# Altium PCB TX_LPF_Add_on.PcbDoc (part 1 of 2)
Units mm, origin at the board's own origin, x right, y up, seen from the top; angles counter-clockwise.
Board outline 187.14 x 77.23 mm, 2 copper layers (Top Layer, Top, Bottom Layer, Bottom); 102 components, 53 nets, 283 pads, 1391 vias.
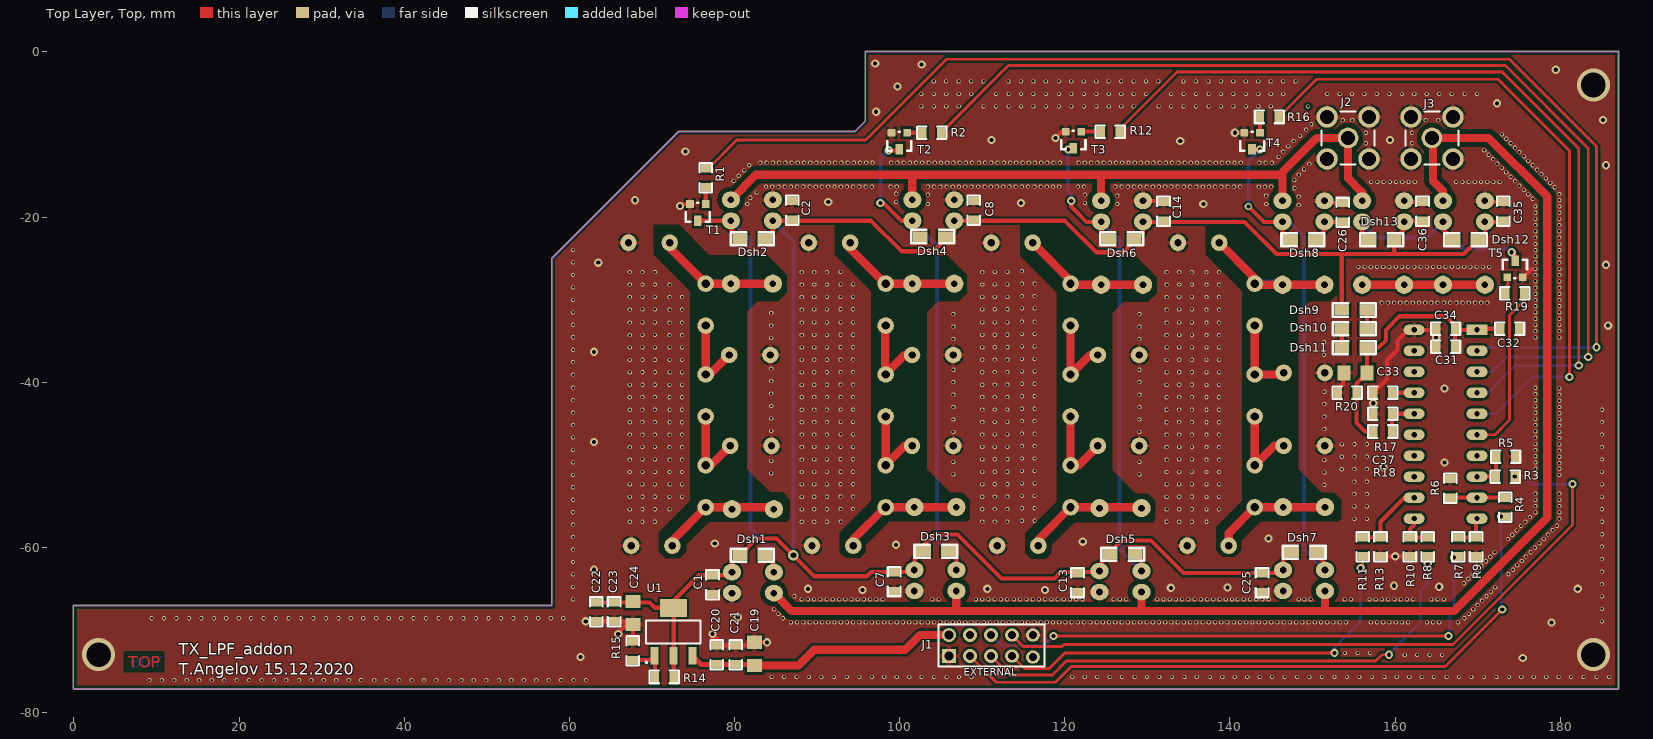
[diagram p0: Top Layer, Top view]
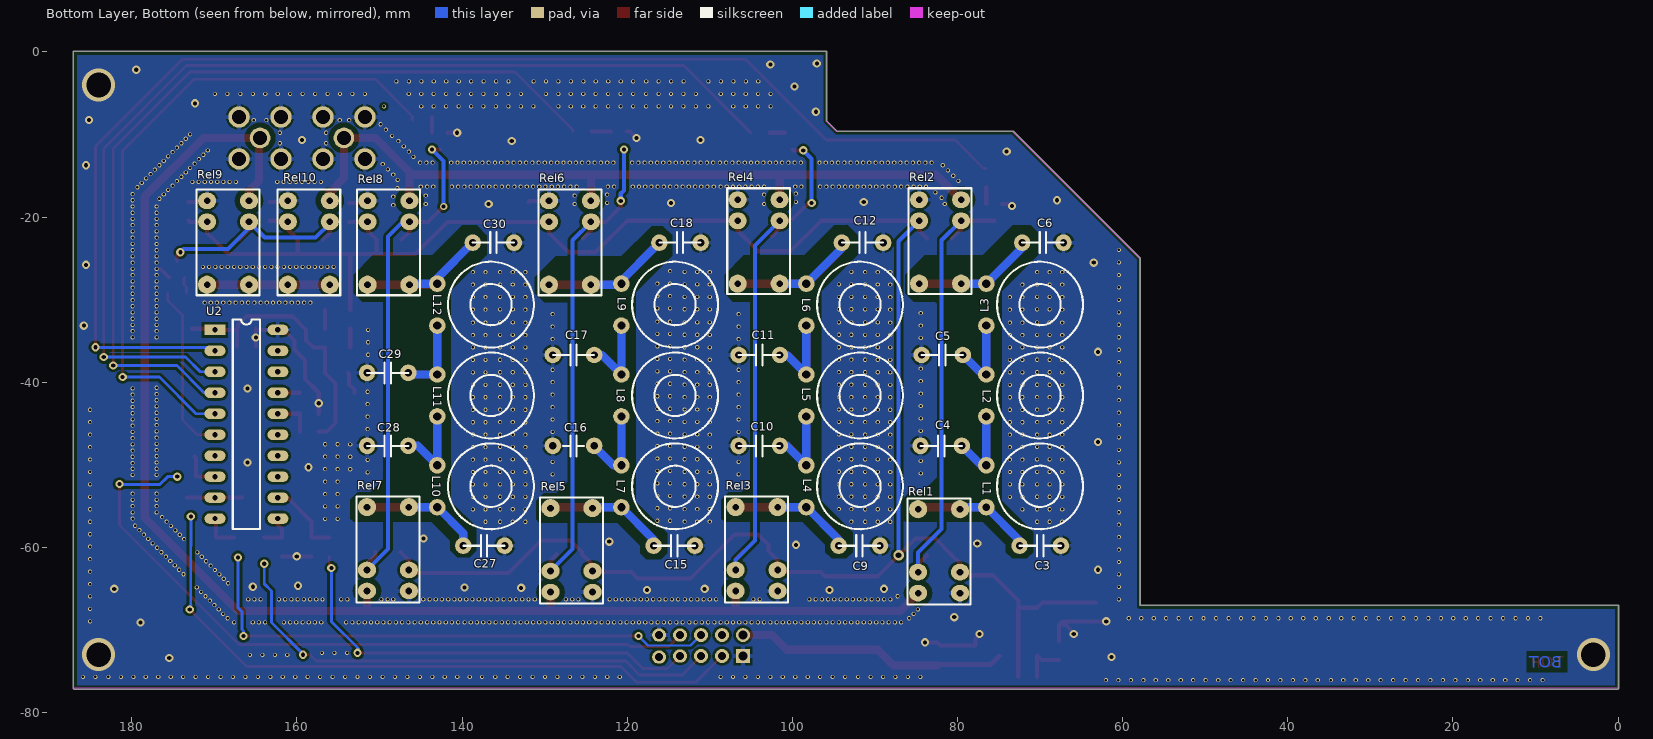
[diagram p1: Bottom Layer, Bottom view, seen from below]

## Layer stack, top to bottom
Top Solder, Top Mask: solder mask 0.0102, Solder Resist, Dk 3.5
Top Layer, Top: signal copper 0.0356
Dielectric 1: dielectric 0.32, FR-4, Dk 4.8
Bottom Layer, Bottom: signal copper 0.0356
Bottom Solder, Bot Mask: solder mask 0.0102, Solder Resist, Dk 3.5

## Board outline
-0.07,-77 ccw(c0,-77) -0.055,-77.044 ccw(c0,-77.088) 0,-77.159 186.999,-77.158 ccw(c186.999,-77.088) 187.069,-77.088 ccw(c186.999,-77.088) 187.054,-77.045 ccw(c187,-77) 187.07,-77 187.07,0 ccw(c187,0) 186.97,0.064 95.906,0.064 ccw(c95.876,0) 95.806,0 95.806,-8.362 94.586,-9.582 73.279,-9.582 ccw(c73.279,-9.652) 73.229,-9.602 cw(c73.279,-9.652) 73.229,-9.602 57.862,-24.969 cw(c57.912,-25.019) 57.862,-24.969 ccw(c57.912,-25.019) 57.842,-25.019 57.842,-67.018 0,-67.018 ccw(c0,-67.088) -0.07,-67.088

## Design rules (kind name [scope] priority, off if disabled: settings)
BoardOutlineClearance [All] p1: gap=0.2 ignorepadtopadclearanceinfootprint=FALSE except(0.4: Arc-SplitBarrior Arc-SplitContinuation Track-SplitBarrior Track-SplitContinuation SMDPad-SplitBarrior SMDPad-SplitContinuation THPad-SplitBarrior THPad-SplitContinuation Via-SplitBarrior Via-SplitContinuation Fill-SplitBarrior Fill-SplitContinuation Poly-SplitBarrior Poly-SplitContinuation Region-SplitBarrior Region-SplitContinuation Text-SplitBarrior Text-SplitContinuation)
Clearance Clearance_3 [InNet('NetJ3_5') vs InNet('GND')] p1: gap=0.6 ignorepadtopadclearanceinfootprint=FALSE
Clearance Clearance_NetJ2_5 [InNet('NetJ2_5') vs InNet('GND')] p2: gap=0.6 ignorepadtopadclearanceinfootprint=FALSE
Clearance [All] p3: gap=0.3 ignorepadtopadclearanceinfootprint=FALSE
HoleSize [All] p1: absolutevalues=TRUE maxlimit=6.3 minlimit=0.2 maxpercent=80.000 minpercent=20.000
MinimumAnnularRing [All] p1: minimumring=0.076
MinimumSolderMaskSliver [All] p1: minsoldermaskwidth=0.01
PolygonConnect PolygonConnect_1 [All] p1: thpad.connectstyle=Relief thpad.reliefconductorwidth=0.508 thpad.reliefentries=4 thpad.polygonreliefangle="90 Angle" thpad.airgapwidth=0.254 smdpad.connectstyle=Relief smdpad.reliefconductorwidth=0.508 smdpad.reliefentries=4 smdpad.polygonreliefangle="90 Angle" smdpad.airgapwidth=0.254 via.connectstyle=Direct via.reliefconductorwidth=0.508 via.reliefentries=4 via.polygonreliefangle="90 Angle" via.airgapwidth=0.254
RoutingCorners [All] p1: cornerstyle=Round minsetback=2.54 maxsetback=2.54
RoutingVias [All] p1: holewidth=0.5 width=1 viastyle="Through Hole" minholewidth=0.2 minwidth=0.45 maxholewidth=1 maxwidth=2
SilkToSilkClearance [All] p1 off: silktosilkclearance=0.01
SilkToSolderMaskClearance [IsPad] p1 off: minsilkscreentomaskgap=0.01 clearancetoexposedcopper=TRUE
SolderMaskExpansion [All] p1: expansion=0.102
Width [All] p1: maxlimit=2.54 minlimit=0.089 preferedwidth=0.381
25 further rules are at their usual default settings.

## Components (designator, comment, footprint, x,y, rotation, side; value= is the part's Value field where it differs from the comment)
C1 "" 0805S 77.343,-63.373 r270 top value=1u
C2 "" 0805S 86.995,-18.034 r270 top value=1u
C3 "CAP_5mm" CAP_5mm 69.977,-59.8 r0 bottom value=470p
C4 "CAP_5mm" CAP_5mm 81.975,-47.7 r180 bottom value=1.2n
C5 "CAP_5mm" CAP_5mm 81.848,-36.7 r180 bottom value=1.2n
C6 "CAP_5mm" CAP_5mm 69.656,-23.1 r0 bottom value=470p
C7 "" 0805S 99.314,-62.992 r270 top value=1u
C8 "" 0805S 108.966,-18.034 r270 top value=1u
C9 "CAP_5mm" CAP_5mm 91.881,-59.8 r0 bottom value=270p
C10 "CAP_5mm" CAP_5mm 104,-47.7 r180 bottom value=680n
C11 "CAP_5mm" CAP_5mm 104,-36.7 r180 bottom value=680n
C12 "CAP_5mm" CAP_5mm 91.5,-23.1 r0 bottom value=270p
C13 "" 0805S 121.539,-63.119 r270 top value=1u
C14 "" 0805S 131.953,-18.161 r270 top value=1u
C15 "CAP_5mm" CAP_5mm 114.3,-59.8 r0 bottom value=180p
C16 "CAP_5mm" CAP_5mm 126.5,-47.7 r180 bottom value=390p
C17 "CAP_5mm" CAP_5mm 126.5,-36.7 r180 bottom value=390p
C18 "CAP_5mm" CAP_5mm 113.598,-23.1 r0 bottom value=180p
C19 "C0805" CAP_1206 82.423,-72.901 r270 top value=10u
C20 "C0805" 0805S 77.851,-71.882 r270 top value=100n
C21 "C0805" 0805S 80.137,-71.882 r270 top value=1u
C22 "C0805" 0805S 63.246,-68.961 r90 top value=100n
C23 "C0805" 0805S 65.405,-68.961 r90 top value=1u
C24 "C0805" CAP_1206 67.691,-67.945 r90 top value=10u
C25 "" 0805S 143.891,-63.119 r270 top value=1u
C26 "" 0805S 153.67,-18.288 r270 top value=1u
C27 "CAP_5mm" CAP_5mm 137.347,-59.8 r0 bottom value=100p
C28 "CAP_5mm" CAP_5mm 149,-47.7 r180 bottom value=220p
C29 "CAP_5mm" CAP_5mm 149,-38.862 r180 bottom value=220p
C30 "CAP_5mm" CAP_5mm 136.204,-23.1 r0 bottom value=100p
C31 "C0805" 0805S 164.973,-35.687 r0 top value=100n
C32 "C0805" 0805S 175.006,-33.528 r180 top value=1u
C33 "C0805" CAP_1206 155.194,-38.862 r0 top value=10u
C34 "C0805" 0805S 167.259,-33.528 r180 top value=100n
C35 "" 0805S 173.101,-18.161 r270 top value=1u
C36 "" 0805S 163.322,-20.447 r90 top value=1u
C37 "C0805" 0805S 157.353,-43.815 r0 top value=100n
Dsh1 "DIODE_Shottky_Micr.M" "1N4148 (1005)" 83.693,-60.96 r180 top value=1N4148
Dsh2 "DIODE_Shottky_Micr.M" "1N4148 (1005)" 80.643,-22.606 r0 top value=1N4148
Dsh3 "DIODE_Shottky_Micr.M" "1N4148 (1005)" 105.92,-60.452 r180 top value=1N4148
Dsh4 "DIODE_Shottky_Micr.M" "1N4148 (1005)" 102.487,-22.352 r0 top value=1N4148
Dsh5 "DIODE_Shottky_Micr.M" "1N4148 (1005)" 128.526,-60.833 r180 top value=1N4148
Dsh6 "DIODE_Shottky_Micr.M" "1N4148 (1005)" 125.347,-22.606 r0 top value=1N4148
Dsh7 "DIODE_Shottky_Micr.M" "1N4148 (1005)" 150.495,-60.579 r180 top value=1N4148
Dsh8 "DIODE_Shottky_Micr.M" "1N4148 (1005)" 147.318,-22.733 r0 top value=1N4148
Dsh9 "DIODE_Shottky_Micr.M" "1N4148 (1005)" 153.543,-31.242 r0 top value=1N4148
Dsh10 "DIODE_Shottky_Micr.M" "1N4148 (1005)" 156.591,-33.528 r180 top value=1N4148
Dsh11 "DIODE_Shottky_Micr.M" "1N4148 (1005)" 153.543,-35.814 r0 top value=1N4148
Dsh12 "DIODE_Shottky_Micr.M" "1N4148 (1005)" 167.003,-22.733 r0 top value=1N4148
Dsh13 "DIODE_Shottky_Micr.M" "1N4148 (1005)" 156.843,-22.733 r0 top value=1N4148
J1 "EXTERNAL" 90131-0126 109.788,-71.888 r0 top locked
J2 "Output" 31-5431 154.305,-10.414 r0 top locked value=LPF_OUT
J3 "Input" 31-5431 164.465,-10.414 r0 top locked value=LPF_IN
L1 "IND_T37-2" IND_T37-2#1 70,-52.6 r90 bottom value=2.4uH
L2 "IND_T37-2" IND_T37-2#2 70,-41.6 r90 bottom value=3uH
L3 "IND_T37-2" IND_T37-2#2 70,-30.6 r90 bottom value=2.4uH
L4 "IND_T37-2" IND_T37-2#2 91.8,-52.6 r90 bottom value=1.4uH
L5 "IND_T37-2" IND_T37-2#2 91.8,-41.6 r90 bottom value=1.7uH
L6 "IND_T37-2" IND_T37-2#2 91.8,-30.6 r90 bottom value=1.4uH
L7 "IND_T37-2" IND_T37-2#2 114.2,-52.6 r90 bottom value=0.58uH
L8 "IND_T37-2" IND_T37-2#2 114.2,-41.6 r90 bottom value=0.78uH
L9 "IND_T37-2" IND_T37-2#2 114.2,-30.6 r90 bottom value=0.58uH
L10 "IND_T37-2" IND_T37-2#2 136.5,-52.6 r90 bottom value=0.26uH
L11 "IND_T37-2" IND_T37-2#2 136.5,-41.6 r90 bottom value=0.32uH
L12 "IND_T37-2" IND_T37-2#2 136.5,-30.6 r90 bottom value=0.26uH
R1 "" 0805S 76.514,-16.383 r90 top value=2.2k
R2 "" 0805S 102.743,-9.779 r0 top value=2.2k
R3 "R0805" 0805S 174.498,-51.435 r180 top value=9.1k
R4 "R0805" 0805S 173.355,-56.261 r90 top value=9.1k
R5 "R0805" 0805S 174.526,-49.03 r180 top value=3k
R6 "R0805" 0805S 166.663,-51.689 r270 top value=3k
R7 "R0805" 0805S 167.64,-61.087 r90 top value=9.1k
R8 "R0805" 0805S 163.957,-61.087 r90 top value=9.1k
R9 "R0805" 0805S 169.799,-61.087 r90 top value=3k
R10 "R0805" 0805S 161.798,-61.087 r90 top value=3k
R11 "R0805" 0805S 156.083,-61.087 r90 top value=9.1k
R12 "" 0805S 124.333,-9.652 r0 top value=2.2k
R13 "R0805" 0805S 158.242,-61.087 r90 top value=3k
R14 "R0805" 0805S 70.358,-75.692 r0 top value=240
R15 "R0805" 0805S 67.691,-73.66 r90 top value=680
R16 "" 0805S 143.637,-7.874 r0 top value=2.2k
R17 "R0805" 0805S 157.353,-41.275 r0 top value=10k
R18 "R0805" 0805S 157.353,-45.974 r0 top value=10k
R19 "" 0805S 173.355,-29.21 r0 top value=2.2k
R20 "R0805" 0805S 155.321,-41.275 r180 top value=5.1k
Rel1 "G5V-1-DC5" G5V-1 84.769,-65.532 r90 bottom
Rel2 "G5V-1-DC5" G5V-1 79.562,-17.907 r270 bottom
Rel3 "G5V-1-DC5" G5V-1 106.867,-65.278 r90 bottom
Rel4 "G5V-1-DC5" G5V-1 101.533,-17.907 r270 bottom
Rel5 "G5V-1-DC5" G5V-1 129.286,-65.405 r90 bottom
Rel6 "G5V-1-DC5" G5V-1 124.393,-18.034 r270 bottom
Rel7 "G5V-1-DC5" G5V-1 151.511,-65.278 r90 bottom
Rel8 "G5V-1-DC5" G5V-1 146.364,-18.034 r270 bottom
Rel9 "G5V-1-DC5" G5V-1 165.795,-18.034 r270 bottom
Rel10 "G5V-1-DC5" G5V-1 156.016,-18.034 r270 bottom
T1 "NPN" SOT-23 76.514,-18.415 r180 top value=BC817
T2 "NPN" SOT-23 100.914,-9.779 r180 top value=BC817
T3 "NPN" SOT-23 121.996,-9.652 r180 top value=BC817
T4 "NPN" SOT-23 143.637,-9.779 r180 top value=BC817
T5 "NPN" SOT-23 173.56,-27.305 r0 top value=BC817
U1 "LT1117IST-ADJ" LT1117IST-ADJ 72.517,-70.231 r90 top value=LT1117-ADJ
U2 "MSP430G2553" DIP20M 169.926,-33.655 r180 bottom

## Footprints (in the part's own frame and the unit in brackets; to place one, negate y for a bottom-side part, rotate by r counter-clockwise, add the part's x,y. Pads: shape width x height; smd on the part's side, far side on the other; paste and mask are expansions set on the pad)
"1N4148 (1005)" [mm]
  rect 1.8x1.27 smd: A(0,0) K(3.05,0)
  silkscreen extent -1.07,-0.8 4.13,0.8
31-5431 [mm]
  round 2.6 hole 1.7: 1(-2.54,-2.54) 2(2.54,-2.54) 3(2.54,2.54) 4(-2.54,2.54)
  round 2.5 hole 1.7: 5(0,0)
  silkscreen extent -3.2,-3.2 3.2,3.2
0805S [mil]
  rect 40x50 smd: 1(0,0) 2(90,0)
  silkscreen extent -25,-30 115,30
90131-0126 [mm]
  rect 1.7x1.7 hole 1.1: 1(-3.81,-1.27)
  round 1.7 hole 1.1: 2(-3.81,1.27)
  round 1.7 hole 1: 3(-1.27,-1.27) 4(-1.27,1.27) 5(1.27,-1.27) 6(1.27,1.27)
  oval 1.7x1.6 hole 1: 7(3.81,-1.27) 8(3.81,1.27) 9(6.35,-1.397) 10(6.35,1.27)
  silkscreen extent -5.08,-2.54 7.75,2.54
CAP_5mm [mm]
  round 2 hole 0.9: 1(-2.5,0) 2(2.5,0)
  silkscreen extent -2.5,-1.27 2.5,1.27
CAP_1206 [mm]
  rect 1.6x1.8 smd: 1(-1.4,0) 2(1.4,0)
DIP20M [mm]
  rect 2.54x1.27 hole 0.635: 1(0,0)
  oval 2.54x1.27 hole 0.635: 2(0,-2.54) 3(0,-5.08) 4(0,-7.62) 5(0,-10.16) 6(0,-12.7) 7(0,-15.24) 8(0,-17.78) 9(0,-20.32) 10(0,-22.86) 11(7.62,-22.86) 12(7.62,-20.32) 13(7.62,-17.78) 14(7.62,-15.24) 15(7.62,-12.7) 16(7.62,-10.16) 17(7.62,-7.62) 18(7.62,-5.08) 19(7.62,-2.54) 20(7.62,0)
  silkscreen extent 2.16,-24.13 5.46,1.27
G5V-1 [mm]
  round 2.2 hole 0.8: 1(10.16,-5.08) 1(10.16,0)
  oval 2x2.2 hole 0.8: 2(0,-5.08) 3(0,0) 4(2.54,0) 5(2.54,-5.08)
  silkscreen extent -1.4,-6.35 11.43,1.27
IND_T37-2#1 [mm]
  round 2 hole 0.9: 1(-2.54,6.5)
  round 2 hole 1: 2(2.54,6.5)
  silkscreen extent -5.2,-5.2 5.2,5.2
IND_T37-2#2 [mm]
  round 2 hole 1: 1(-2.54,6.5) 2(2.54,6.5)
  silkscreen extent -5.2,-5.2 5.2,5.2
LT1117IST-ADJ [mm]
  rect 2.15x0.95 smd: 1(-2.9,2.215) 2(-2.9,-0.085) 3(-2.9,-2.385)
  rect 2.15x3.25 smd: 4(2.9,-0.085)
  silkscreen extent -3.86,-3.38 1.4,3.38
SOT-23 [mil]
  rect 36x36 smd: 1(0,0) 2(75,0)
  rect 36x50 smd: 3(38,80)
  silkscreen extent -20,-5 95,85

## Part data
C1 C2 C7 C8 C13 C14 C25 C26 C35 C36: library part C-EUC0805, "Capacitor"
C3 C4 C5 C6 C9 C10 C11 C12 C15 C16 C17 C18 C27 C28 C29 C30: "CAP_1206"
C19 C20 C21 C22 C23 C24 C31 C32 C33 C34 C37: "Capacitor"
Dsh1 Dsh2 Dsh3 Dsh4 Dsh5 Dsh6 Dsh7 Dsh8 Dsh9 Dsh10 Dsh11 Dsh12 Dsh13: "Diode Shottky"
J1: library part 90131-0126, "2*5 PIN"
J2 J3: library part 31-5431, "SMA"
R1 R2 R12 R16 R19: library part R0805, "Resistor"
R3 R4 R5 R6 R7 R8 R9 R10 R11 R13 R14 R15 R17 R18 R20: "Resistor"
T1 T2 T3 T4 T5: "Bipol. Transistor"

## Via types
v1: diameter 0.5, hole 0.3, Top Layer, Top to Bottom Layer, Bottom, tented both sides, 1313 vias
v2: diameter 1, hole 0.5, Top Layer, Top to Bottom Layer, Bottom, 73 vias
v3: diameter 4, hole 3, Top Layer, Top to Bottom Layer, Bottom, 3 vias
v4: diameter 0.9, hole 0.5, Top Layer, Top to Bottom Layer, Bottom, 1 vias
v5: diameter 1.27, hole 0.711, Top Layer, Top to Bottom Layer, Bottom, 1 vias

## Nets (pads, with @x,y where several pads share a name; then routed paths per layer and width w, separated by ;. In a path a pad name is that pad's centre, name@x,y a point inside that pad or via, vN(x,y) a via of type N, cw(c..) or ccw(c..) an arc to the next point about the centre after c; other vN are vias at no path point)
3.3V: C31.2 C32.2 C33.2 C34.1 Dsh11.K R18.1 R20.1 U2.1 | length 33.7
  Top Layer, Top w0.5: R18.1@157.353,-45.974 156.337,-45.974 155.321,-44.958 R20.1@155.321,-41.275 155.321,-40.135 C33.2@156.594,-38.862 156.594,-35.815 Dsh11.K@156.593,-35.814 157.988,-35.814 158.877,-34.925 158.877,-33.655 160.528,-32.004 166.116,-32.004 167.132,-33.02 167.132,-33.401 C34.1@167.259,-33.528 ; C31.2@167.259,-35.687 C34.1@167.259,-33.528 ; C32.2@172.72,-33.528 170.053,-33.528 U2.1@169.926,-33.655 167.386,-33.655 C34.1@167.259,-33.528
5V: C1.1 C2.2 C7.1 C8.2 C13.1 C14.2 C22.2 C23.2 C24.2 C25.1 C26.2 C35.2 C36.1 Dsh1.K Dsh2.K Dsh3.K Dsh4.K Dsh5.K Dsh6.K Dsh7.K Dsh8.K Dsh9.A Dsh12.K Dsh13.K R14.2 Rel1.5 Rel2.5 Rel3.5 Rel4.5 Rel5.5 Rel6.5 Rel7.5 Rel8.5 Rel9.5 Rel10.5 U1.2 U1.4 | length 274.9
  Top Layer, Top w0.5: C22.2@63.246,-66.675 C23.2@65.405,-66.675 69.723,-66.675 70.358,-67.31 72.581,-67.31 U1.4@72.602,-67.331 ; R14.2@72.644,-75.692 72.644,-67.373 U1.4@72.602,-67.331 ; Dsh2.K@83.693,-22.606 84.642,-21.657 Rel2.5@84.642,-20.447 96.52,-20.447 100.203,-24.13 104.14,-24.13 106.613,-21.657 Rel4.5@106.613,-20.447 120.015,-20.447 123.825,-24.257 127.127,-24.257 129.473,-21.911 Rel6.5@129.473,-20.574 141.772,-20.574 145.669,-24.471 150.368,-24.471 ; Dsh7.K@147.445,-60.579 146.431,-61.593 Rel7.5@146.431,-62.738 146.05,-63.119 C25.1@143.891,-63.119 134.366,-63.119 130.429,-59.182 126.873,-59.182 125.476,-60.579 Dsh5.K@125.476,-60.833 124.206,-62.103 Rel5.5@124.206,-62.865 124.079,-62.992 119.507,-62.992 118.745,-63.754 112.328,-63.754 106.994,-58.42 104.14,-58.42 102.87,-59.69 Dsh3.K@102.87,-60.452 101.787,-61.535 Rel3.5@101.787,-62.738 101.533,-62.992 C7.1@99.314,-62.992 96.52,-62.992 96.012,-63.5 89.662,-63.5 v5(87.122,-60.96) 85.09,-58.928 82.675,-58.928 Dsh1.K@80.643,-60.96 79.689,-61.914 Rel1.5@79.689,-62.992 79.308,-63.373 C1.1@77.343,-63.373 75.692,-63.373 72.602,-66.463 U1.4@72.602,-67.331 ; Dsh9.A@153.543,-31.242 153.543,-24.471 ; C26.2@153.67,-20.574 Rel8.5@151.444,-20.574 151.444,-21.657 Dsh8.K@150.368,-22.733 150.368,-24.471 ; C36.1@163.322,-20.447 161.223,-20.447 Rel10.5@161.096,-20.574 161.096,-21.53 Dsh13.K@159.893,-22.733 159.893,-24.471 ; C35.2@173.101,-20.447 172.974,-20.574 Rel9.5@170.875,-20.574 170.875,-21.911 Dsh12.K@170.053,-22.733 168.315,-24.471 159.893,-24.471 ; 150.368,-24.471 153.543,-24.471 ; 153.543,-24.471 159.893,-24.471
  Bottom Layer, Bottom w0.5: Rel2.5@84.642,-20.447 87.122,-22.927 v5(87.122,-60.96)
+12: C19.2 C20.2 C21.2 J1.2 U1.3 | length 33.1
  Top Layer, Top w0.6: U1.3@74.902,-73.131 75.939,-74.168 C20.2@77.851,-74.168 C21.2@80.137,-74.168 82.29,-74.168 C19.2@82.423,-74.301
  Top Layer, Top w1: C19.2@82.423,-74.301 87.751,-74.301 89.662,-72.39 100.718,-72.39 102.49,-70.618 J1.2@105.978,-70.618
BAND_OUT_0: J1.8 R3.1 | length 86.9
  Top Layer, Top w0.35: J1.8@113.598,-70.618 114.965,-71.985 119.658,-71.985 119.888,-71.755 167.005,-71.755 181.483,-57.277 v2(181.483,-52.324)
  Bottom Layer, Bottom w0.35: v2(174.498,-51.435) 175.65,-51.435 176.606,-52.391 181.416,-52.391 v2(181.483,-52.324)
BAND_OUT_1: J1.3 R4.1 | length 80.7
  Top Layer, Top w0.35: J1.3@108.518,-73.158 111.687,-76.327 118.872,-76.327 120.777,-74.422 166.066,-74.422 v2(172.974,-67.514)
  Bottom Layer, Bottom w0.35: v2(172.847,-56.261) 172.847,-59.817 172.859,-59.829 172.859,-66.988 172.847,-67 172.974,-67.127 v2(172.974,-67.514)
BAND_OUT_2: J1.6 R7.1 | length 67.1
  Top Layer, Top w0.3: v2(167.132,-61.214) 167.259,-61.087 R7.1@167.64,-61.087
  Top Layer, Top w0.35: v2(118.618,-70.739) v2(166.465,-70.739)
  Top Layer, Top w0.5: J1.6@111.058,-70.618 J1.6@111.058,-70.044
  Bottom Layer, Bottom w0.3: J1.6@111.058,-70.618 112.322,-71.882 117.475,-71.882 v2(118.618,-70.739)
  Bottom Layer, Bottom w0.35: v2@166.465,-70.485 166.465,-70.136 166.663,-69.938 166.663,-67.789 167.132,-67.32 v2(167.132,-61.214)
BAND_OUT_3: J1.5 R8.1 | length 63.2
  Top Layer, Top w0.35: J1.5@111.058,-73.158 113.338,-75.438 118.491,-75.438 120.183,-73.746 157.654,-73.746 158.4,-73 v2(159.258,-73)
  Bottom Layer, Bottom w0.35: v2(159.258,-73) 159.177,-73 163.089,-69.088 163.089,-65.278 163.957,-64.41 v2(163.957,-61.976)
BND_0: R3.2 R5.2 U2.8 | length 4.8
  Top Layer, Top w0.5: U2.8@169.926,-51.435 R3.2@172.212,-51.435 172.212,-49.157 R5.2@172.339,-49.03 ; R5.2@172.392,-49.03 R5.2@172.392,-49.022
BND_1: R4.2 R6.2 U2.9 | length 6.7
  Top Layer, Top w0.5: R6.2@166.663,-53.975 U2.9@169.926,-53.975 R4.2@173.355,-53.975
BND_2: R7.2 R9.2 U2.10 | length 4.5
  Top Layer, Top w0.5: R7.2@167.64,-58.801 R9.2@169.799,-58.801 169.799,-56.642 U2.10@169.926,-56.515
BND_3: R8.2 R10.2 U2.11 | length 4.5
  Top Layer, Top w0.5: R10.2@161.798,-58.801 R8.2@163.957,-58.801 ; R10.2@161.798,-58.674 161.798,-57.785 162.306,-57.277 U2.11@162.306,-56.515